# Altium PCB rk3288_backend.PcbDoc (part 1 of 3)
Units mm, origin at the board's own origin, x right, y up, seen from the top; angles counter-clockwise.
Board outline 46.39 x 100.03 mm, 4 copper layers (Top Layer, horizontal, vertical, Bottom Layer), stack 0.778 mm thick; 208 components, 207 nets, 778 pads, 333 vias.
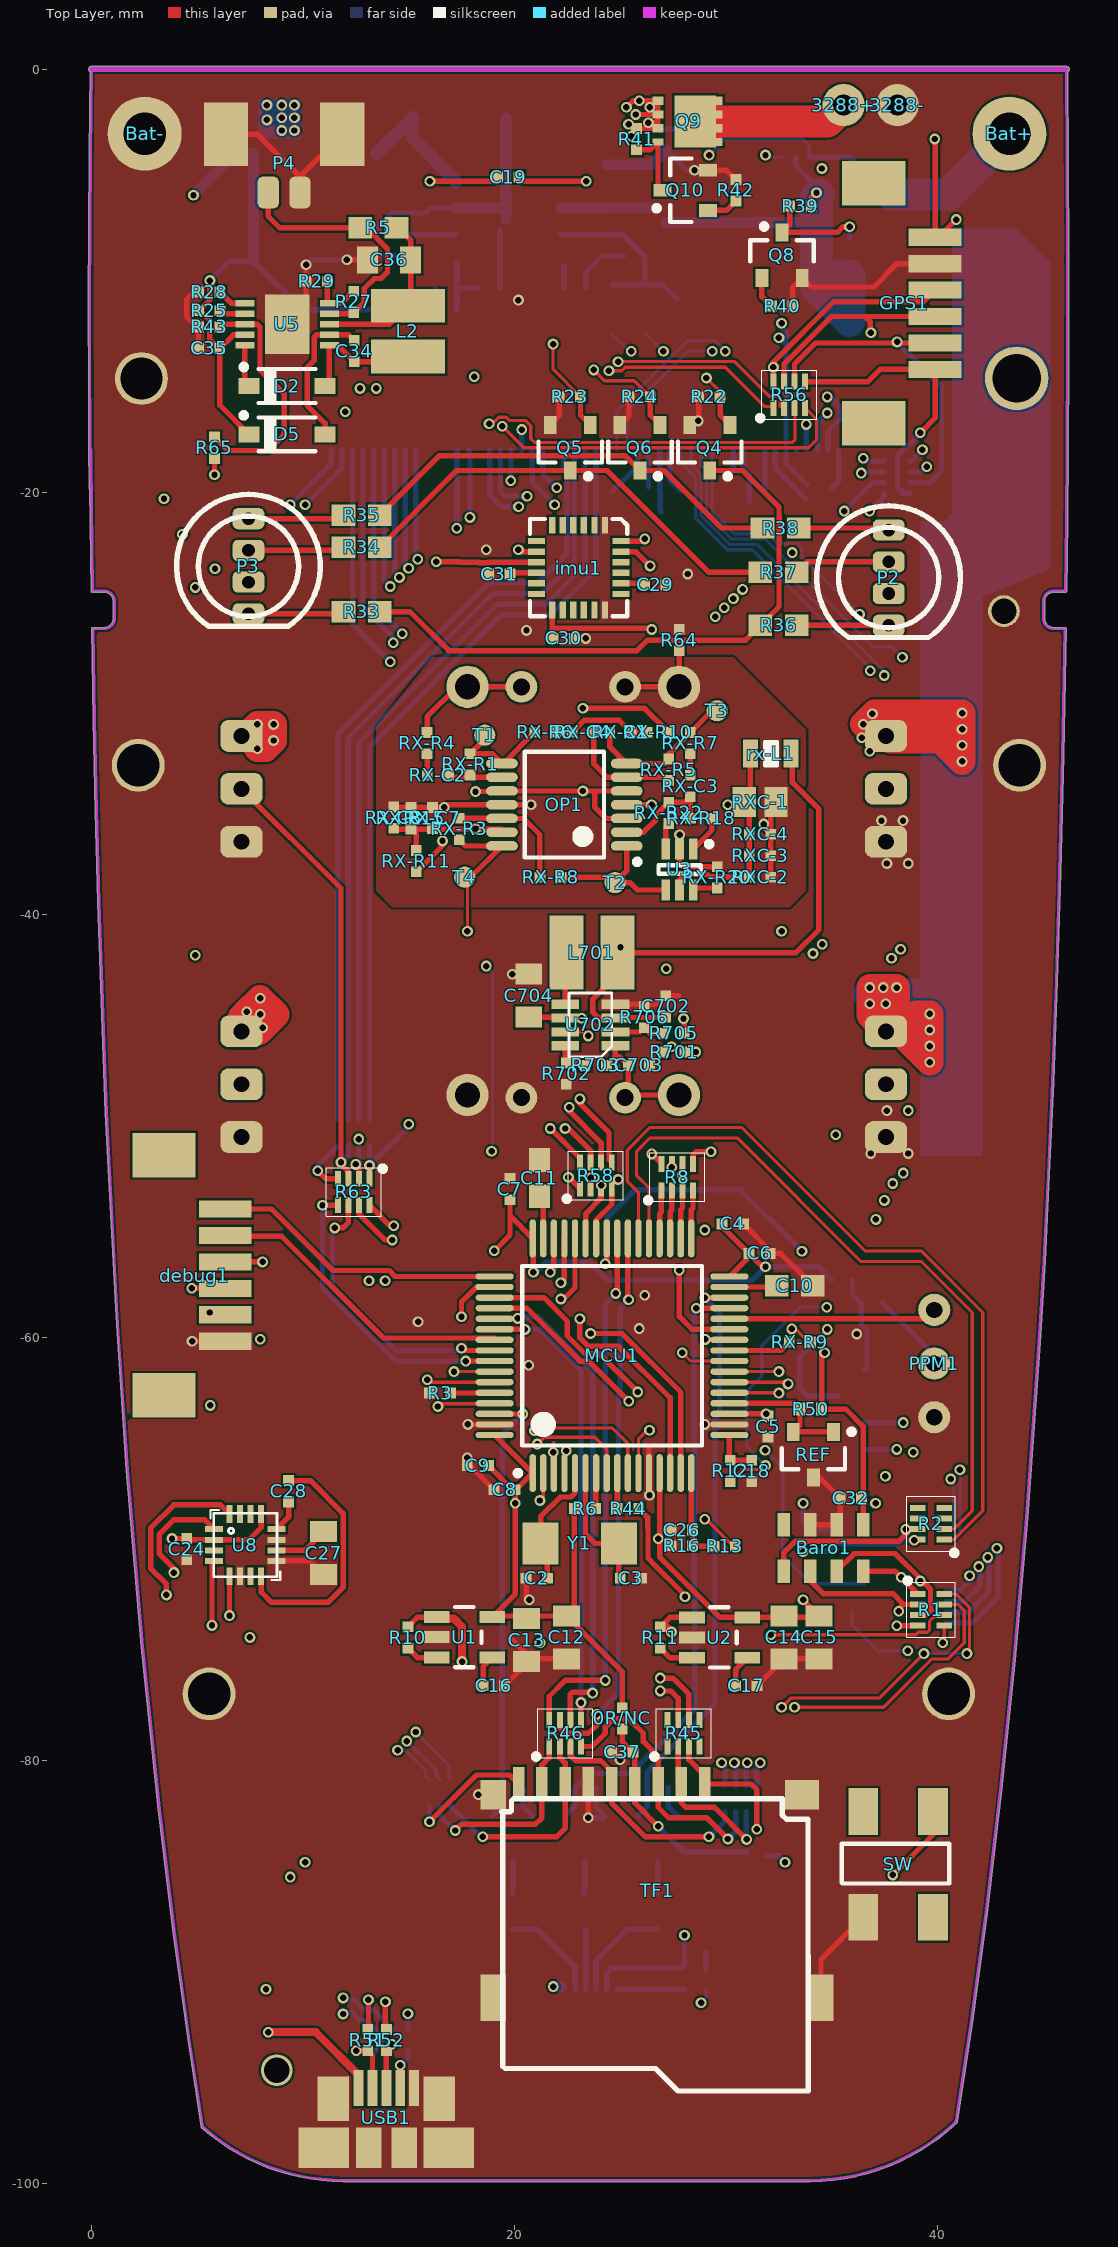
[diagram p0: Top Layer view]
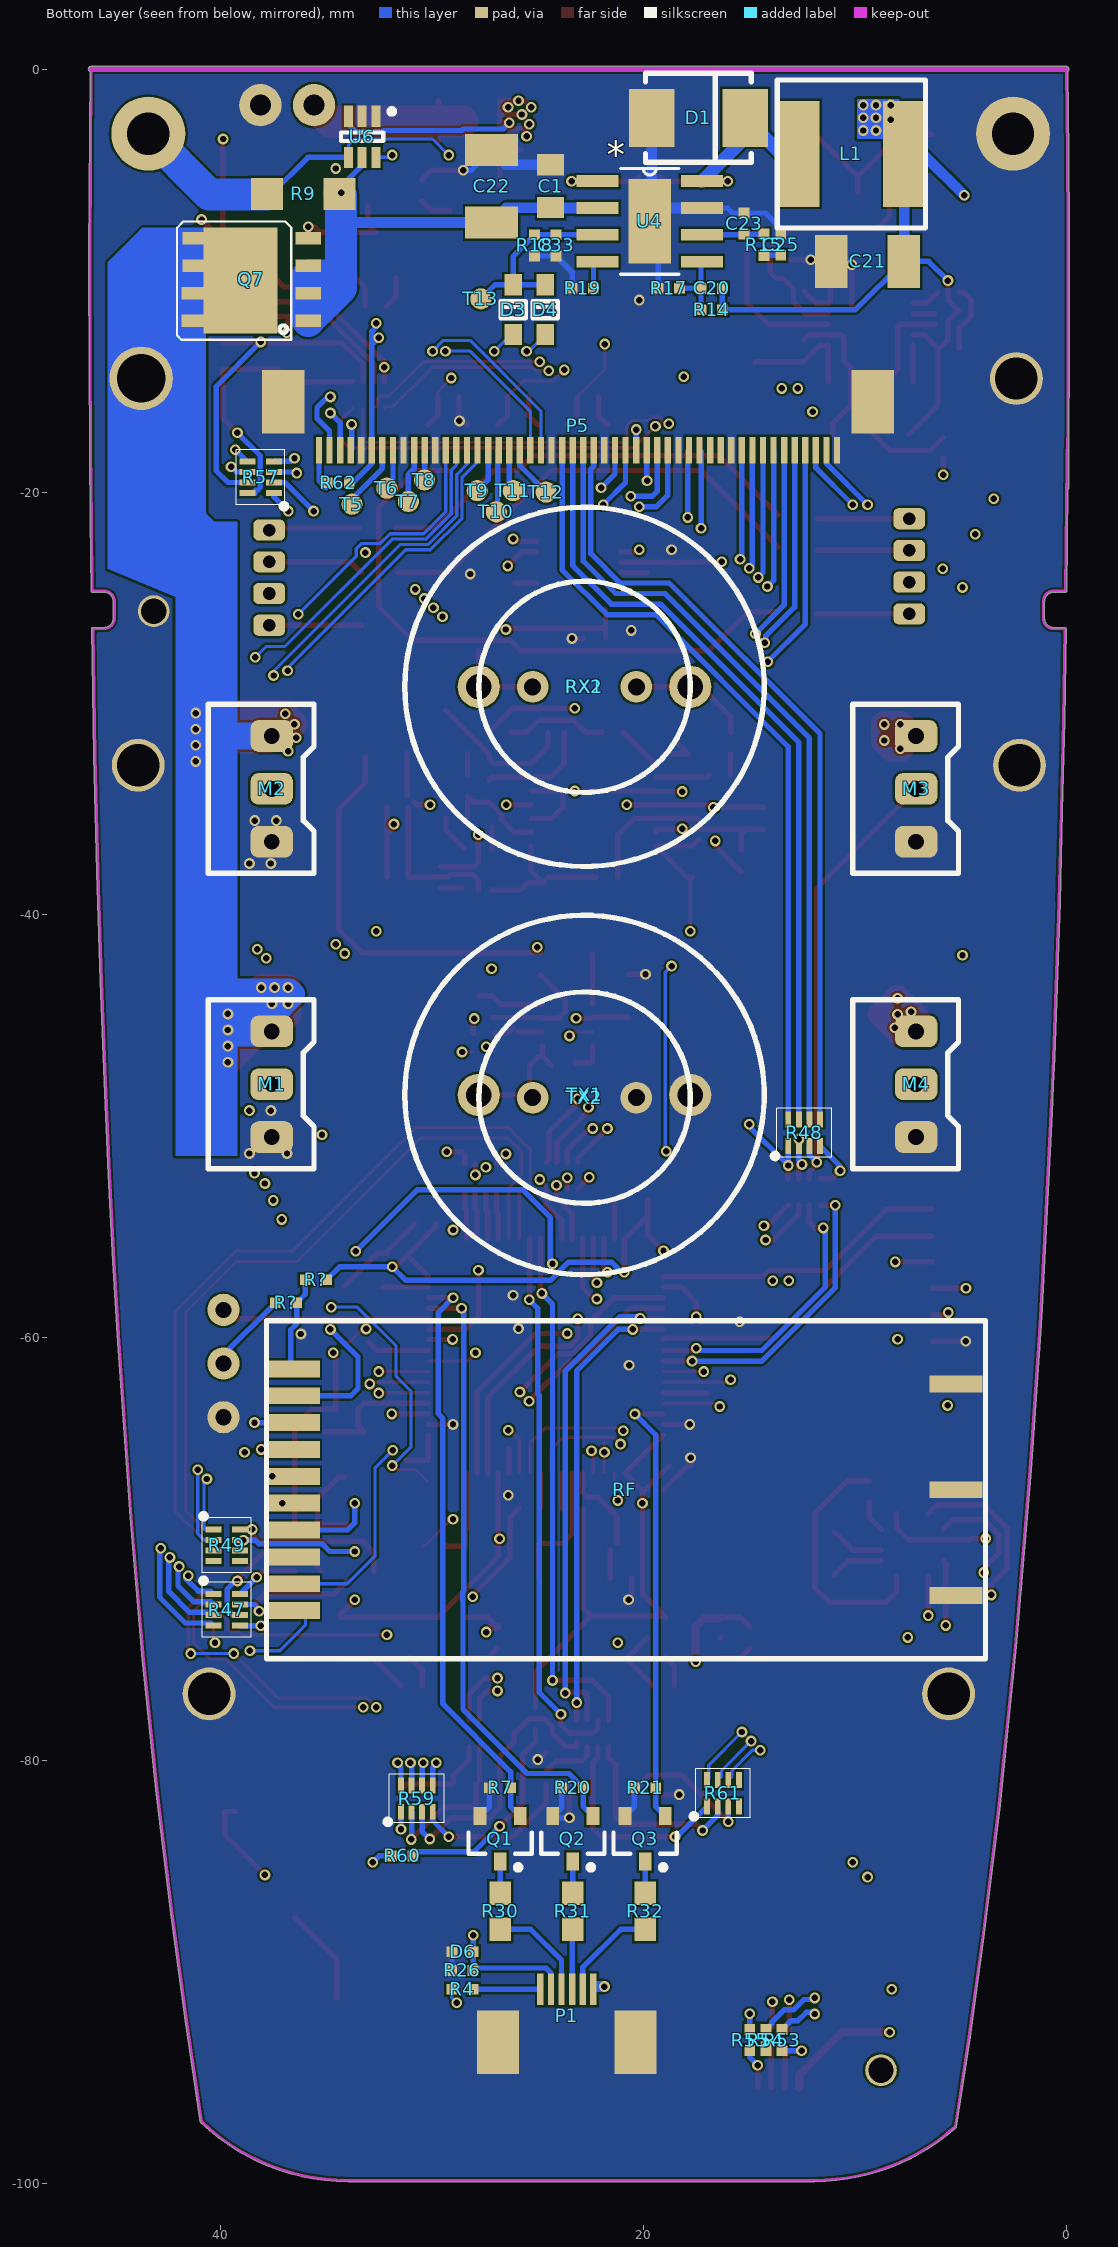
[diagram p1: Bottom Layer view, seen from below]
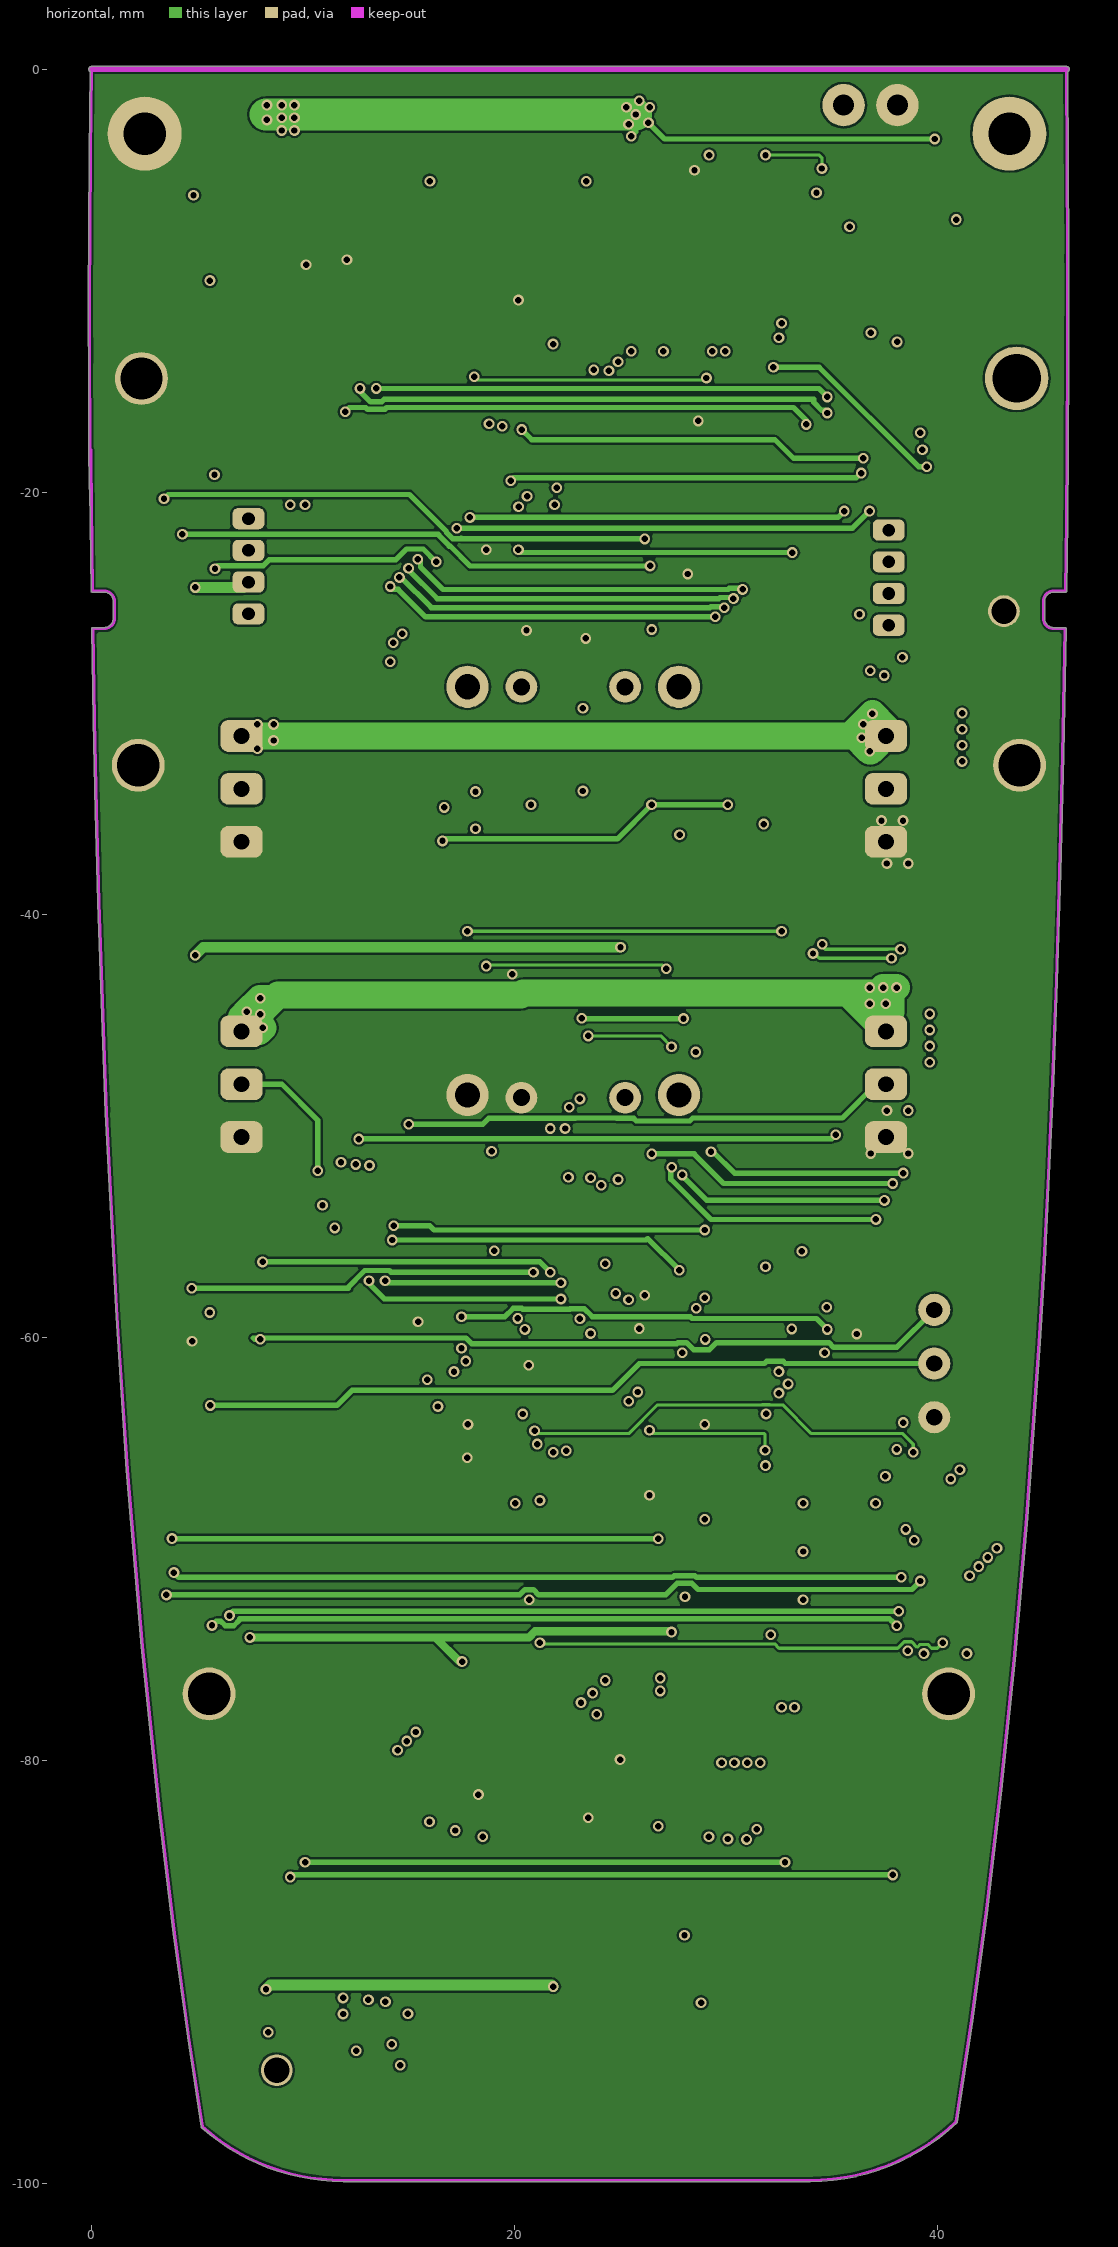
[diagram p2: horizontal]
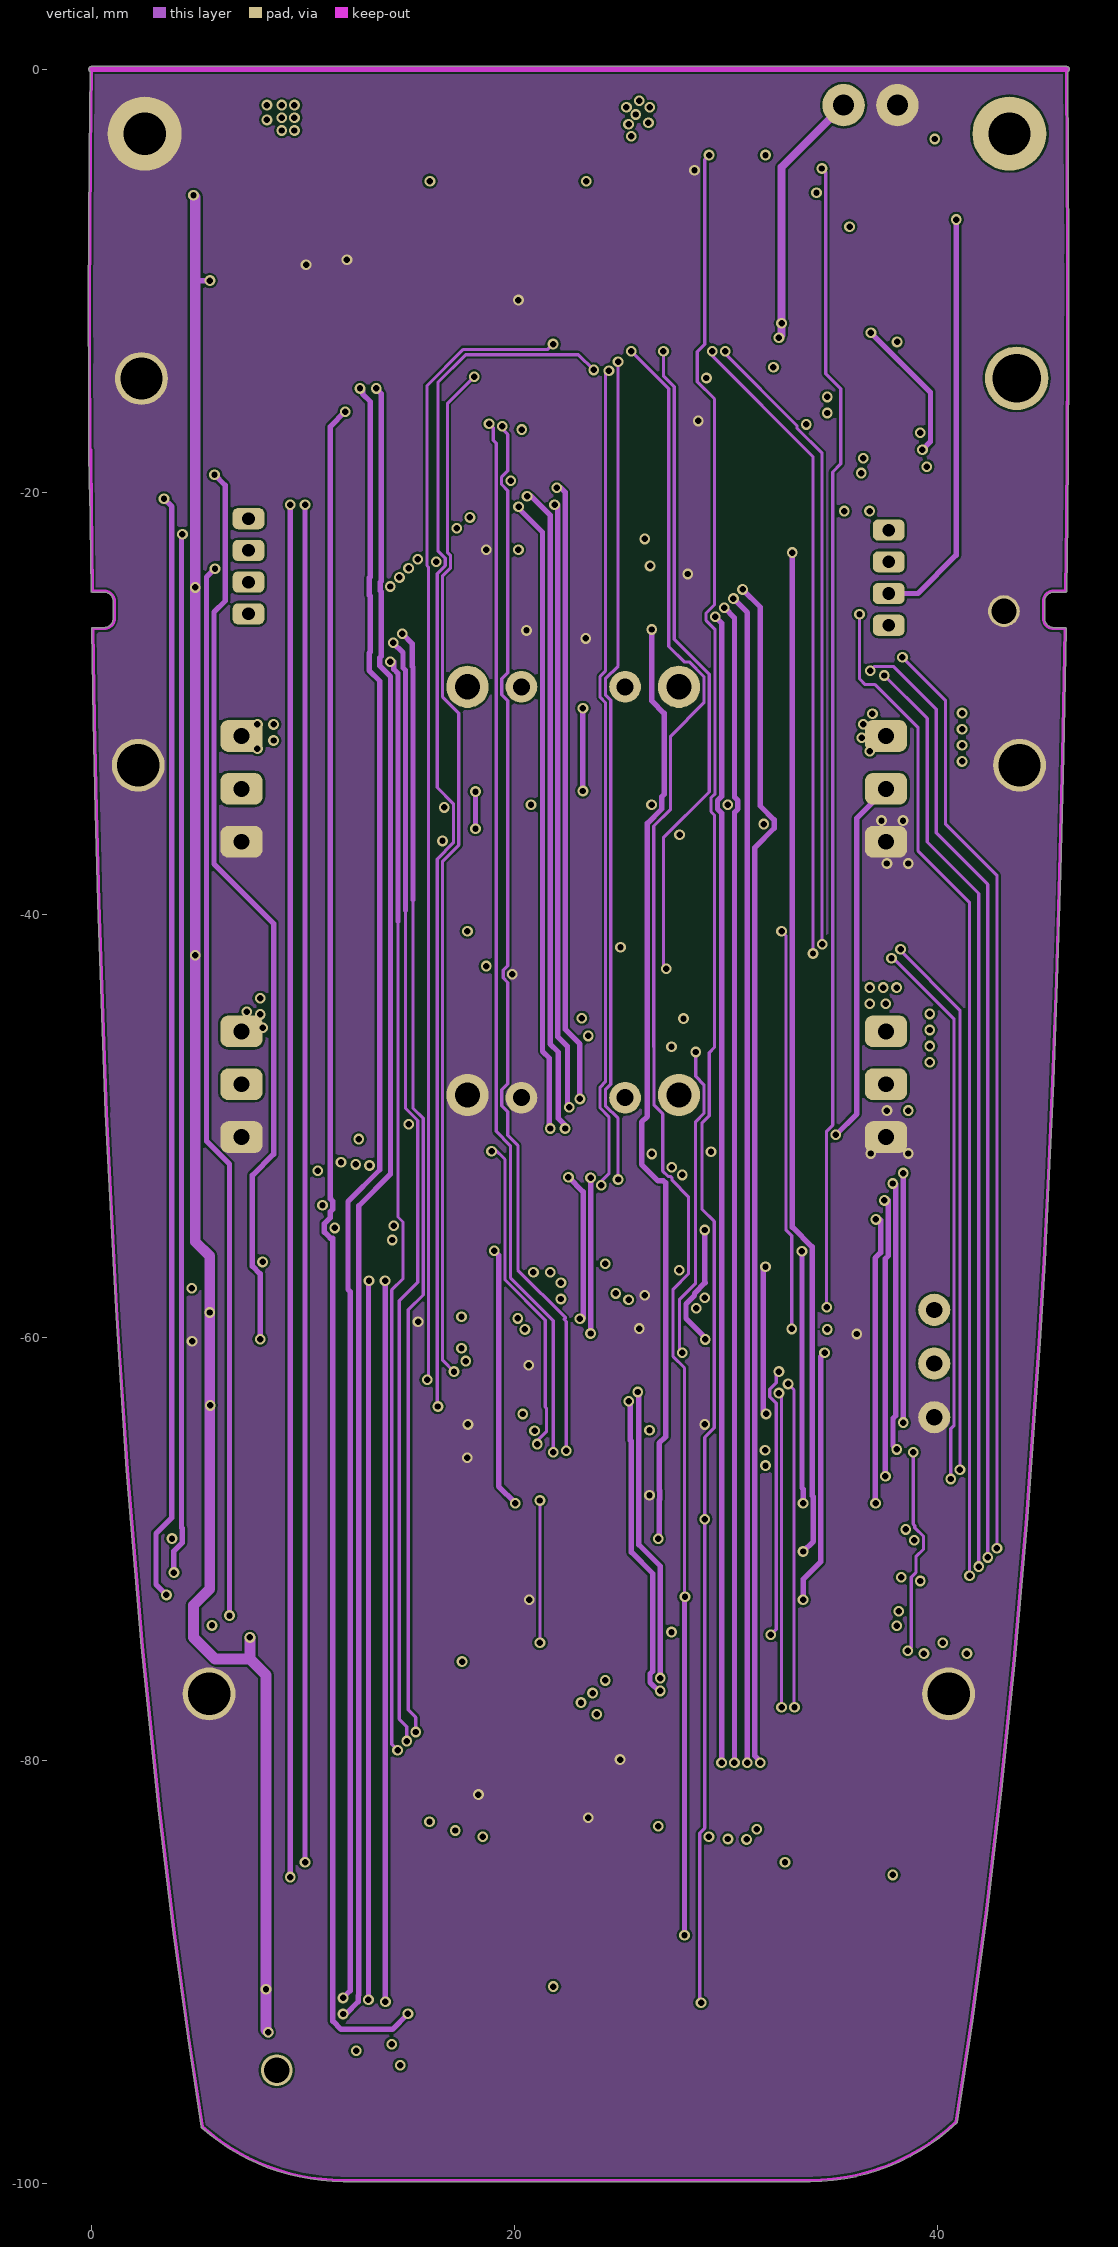
[diagram p3: vertical]

## Layer stack, top to bottom
Top Solder: solder mask 0.0102, Solder Resist, Dk 3.5
Top Layer: signal copper 0.0356
Dielectric 1: core 0.254, FR-4, Dk 4.2
horizontal: signal copper 0.036
Dielectric 2: core 0.254, Dk 4.2
vertical: signal copper 0.036
Dielectric 3: prepreg 0.127, Dk 4.2
Bottom Layer: signal copper 0.0356
Bottom Solder: solder mask 0.0102, Solder Resist, Dk 3.5

## Board outline
1.652,-66.253 1.208,-59.763 cw(c1.272,-59.759) 1.208,-59.762 1.137,-58.592 cw(c1.201,-58.588) 1.137,-58.591 0.661,-49.351 cw(c0.725,-49.348) 0.661,-49.35 cw(c661.906,-20.44) 0.553,-46.759 cw(c0.617,-46.755) 0.553,-46.758 0.298,-39.394 cw(c0.361,-39.39) 0.298,-39.392 cw(c895.193,-12.838) 0.007,-26.473 cw(c0.071,-26.471) 0.051,-26.41 cw(c0.071,-26.471) 0.072,-26.407 0.595,-26.407 ccw(c0.595,-25.971) 1.031,-25.971 cw(c1.095,-25.971) 1.031,-25.97 1.031,-25.171 ccw(c0.595,-25.171) 0.595,-24.735 ccw(c0.595,-25.171) 0.595,-24.735 cw(c0.595,-24.671) 0.595,-24.735 ccw(c0.595,-24.671) 0.595,-24.735 0.045,-24.735 cw(c0.045,-24.671) -0.019,-24.672 -0.071,-19.871 cw(c-0.046,-19.812) -0.11,-19.812 -0.124,-17.785 -0.124,-17.784 -0.128,-17.029 cw(c-0.064,-17.029) -0.128,-17.029 -0.139,-14.084 cw(c-0.075,-14.084) -0.139,-14.084 -0.14,-13.858 cw(c-0.076,-13.858) -0.14,-13.857 cw(c994.234,-11.554) -0.142,-10.896 cw(c-0.078,-10.896) -0.142,-10.896 -0.134,-7.626 cw(c-0.07,-7.627) -0.134,-7.626 -0.11,-4.008 cw(c-0.046,-4.008) -0.11,-4.007 -0.065,-0.109 cw(c0,0) 0,0.127 46.117,0.127 cw(c46.117,0) 46.244,0 cw(c46.117,0) 46.17,-0.116 46.226,-8.734 cw(c46.162,-8.736) 46.226,-8.736 cw(c-1066.82,-9.586) 46.226,-9.586 cw(c-1066.82,-9.586) 46.195,-17.994 ccw(c46.131,-17.993) 46.195,-17.993 46.195,-17.994 cw(c-1066.82,-9.586) 46.124,-24.672 cw(c46.06,-24.671) 46.096,-24.724 ccw(c46.06,-24.671) 46.124,-24.671 46.096,-24.724 cw(c46.06,-24.671) 46.06,-24.735 ccw(c46.06,-24.671) 46.096,-24.724 46.06,-24.735 45.511,-24.735 cw(c45.511,-24.671) 45.51,-24.735 cw(c45.511,-25.171) 45.511,-24.735 45.51,-24.735 ccw(c45.511,-25.171) 45.075,-25.171 cw(c45.011,-25.171) 45.075,-25.173 45.075,-25.971 ccw(c45.511,-25.971) 45.511,-26.407 cw(c45.511,-26.471) 45.511,-26.407 46.034,-26.407 cw(c46.034,-26.471) 46.098,-26.471 cw(c46.034,-26.471) 46.098,-26.472 45.987,-32.454 ccw(c45.923,-32.453) 45.987,-32.453 45.987,-32.454 cw(c45.923,-32.453) 45.987,-32.454 cw(c45.923,-32.453) 45.987,-32.455 45.987,-32.454 45.987,-32.455 45.849,-37.983 ccw(c45.785,-37.982) 45.849,-37.982 45.849,-37.983 ccw(c45.785,-37.982) 45.849,-37.983 cw(c45.785,-37.982) 45.849,-37.984 45.686,-43.143 ccw(c45.622,-43.141) 45.686,-43.141 45.686,-43.143 cw(c45.622,-43.141) 45.686,-43.143 45.505,-47.896 ccw(c45.441,-47.893) 45.505,-47.893 45.505,-47.896 cw(c45.441,-47.893) 45.505,-47.896 45.307,-52.288 cw(c45.244,-52.286) 45.307,-52.289 45.095,-56.378 cw(c45.032,-56.375) 45.095,-56.379 ccw(c45.032,-56.375) 45.095,-56.378 45.095,-56.379 44.868,-60.227 cw(c44.804,-60.223) 44.868,-60.228 44.279,-68.505 cw(c44.215,-68.501) 44.279,-68.506 44.279,-68.507 ccw(c44.215,-68.501) 44.279,-68.506 44.279,-68.507 43.69,-75.229 ccw(c43.627,-75.224) 43.69,-75.229 cw(c43.627,-75.224) 43.69,-75.23 43.058,-81.363 cw(c42.994,-81.356) 43.058,-81.364 cw(c42.994,-81.356) 43.058,-81.364 42.384,-87.031 cw(c42.32,-87.024) 42.384,-87.031 cw(c42.32,-87.024) 42.384,-87.032 41.673,-92.295 cw(c41.609,-92.287) 41.672,-92.296 40.947,-97.083 cw(c40.884,-97.073) 40.927,-97.12 ccw(c33.983,-89.836) 40.928,-97.119 40.927,-97.12 cw(c33.983,-89.836) 33.984,-99.9 cw(c33.983,-89.836) 33.983,-99.9 ccw(c33.983,-99.836) 33.984,-99.9 33.983,-99.9 27.848,-99.9 cw(c27.848,-99.836) 27.838,-99.899 cw(c27.828,-99.836) 27.828,-99.9 18.278,-99.9 cw(c18.278,-99.836) 18.267,-99.899 cw(c18.257,-99.836) 18.257,-99.9 11.905,-99.9 cw(c11.905,-99.836) 11.904,-99.9 ccw(c11.905,-89.836) 11.905,-99.9 ccw(c11.905,-99.836) 11.905,-99.9 11.904,-99.9 cw(c11.905,-89.836) 5.217,-97.356 cw(c5.259,-97.308) 5.196,-97.316 4.544,-93.061 cw(c4.607,-93.052) 4.544,-93.061 cw(c4.607,-93.052) 4.544,-93.06 3.871,-88.182 cw(c3.935,-88.173) 3.871,-88.18 3.156,-82.31 cw(c3.22,-82.302) 3.156,-82.309 2.358,-74.608 cw(c2.421,-74.601) 2.357,-74.607 1.652,-66.254 cw(c1.716,-66.249)

## Design rules (kind name [scope] priority, off if disabled: settings)
Clearance [All] p1: gap=0.102
DiffPairsRouting [All] p1: maxlimit=0.254 minlimit=0.254 mostfreqgap=0.254 toplayer_minwidth=0.152 toplayer_maxwidth=0.381 toplayer_prefwidth=0.254 midlayer1_minwidth=0.152 midlayer1_maxwidth=0.381 midlayer1_prefwidth=0.254 midlayer2_minwidth=0.152 midlayer2_maxwidth=0.381 midlayer2_prefwidth=0.254 bottomlayer_minwidth=0.152 bottomlayer_maxwidth=0.381 bottomlayer_prefwidth=0.254 maxuncoupledlength=12.7
MinimumSolderMaskSliver [All] p1 off: minsoldermaskwidth=0.254
PlaneConnect [All] p1: planeconnectstyle=Direct reliefexpansion=0.508 reliefentries=4 reliefconductorwidth=0.254 reliefairgap=0.254
PolygonConnect [All] p1: connectstyle=Direct reliefconductorwidth=0.254 reliefentries=4 polygonreliefangle="90 Angle" airgapwidth=0.254
RoomDefinition sonar_tx [InComponentClass('sonar_tx')] p1 off: confinementstyle=ConfineIn formatcopy=TRUE lockcomponents=FALSE outline -37.668,21.539 -14.554,21.539 -14.554,-9.906 -37.668,-9.906
RoomDefinition sonar_rx [InComponentClass('sonar_rx')] p2 off: confinementstyle=ConfineIn formatcopy=TRUE lockcomponents=FALSE outline -84.582,42.139 -27.076,42.139 -27.076,74.371 -84.582,74.371
RoomDefinition sensor [InComponentClass('sensor')] p3 off: confinementstyle=ConfineIn formatcopy=TRUE lockcomponents=FALSE outline -87.63,-32.41 -46.914,-32.41 -46.914,-54.94 -87.63,-54.94
RoomDefinition rk3288 [InComponentClass('rk3288')] p4 off: confinementstyle=ConfineIn formatcopy=TRUE lockcomponents=FALSE outline -14.224,-63.881 -37.668,-63.881 -37.668,-36.424 -14.224,-36.424
RoomDefinition power [InComponentClass('power')] p5 off: confinementstyle=ConfineIn formatcopy=TRUE lockcomponents=FALSE outline -58.953,-83.287 -91.948,-83.287 -91.948,-61.087 -58.953,-61.087
RoomDefinition PiAttachment [InComponentClass('PiAttachment')] p6 off: confinementstyle=ConfineIn formatcopy=TRUE lockcomponents=FALSE outline -86.69,-22.25 -48.158,-22.25 -48.158,-0.356 -86.69,-0.356
RoomDefinition mcu [InComponentClass('mcu')] p7 off: confinementstyle=ConfineIn formatcopy=TRUE lockcomponents=FALSE outline -87.325,35.433 -46.304,35.433 -46.304,9.83 -87.325,9.83
RoomDefinition connector [InComponentClass('connector')] p8 off: confinementstyle=ConfineIn formatcopy=TRUE lockcomponents=FALSE outline -44.45,-113.792 -17.928,-113.792 -17.928,-84.836 -44.45,-84.836
RoutingVias [All] p1: holewidth=0.305 width=0.508 viastyle="Through Hole" minholewidth=0.305 minwidth=0.508 maxholewidth=0.711 maxwidth=1.27
SilkToSilkClearance [All] p1 off: silktosilkclearance=0.254
SilkToSolderMaskClearance [IsPad] p1 off: minsilkscreentomaskgap=0.254 clearancetoexposedcopper=TRUE
SolderMaskExpansion [All] p1: expansion=0.102
UnpouredPolygon [All] p1: allowunpoured=FALSE
Width [All] p1: maxlimit=5.08 minlimit=0.102 preferedwidth=0.102
24 further rules are at their usual default settings.

## Classes and differential pairs
component class rk3288: 3288+ 3288- P5 R47 R48 R49 R57 R58 R59 R60 R61 R62 SW T5 T6 T7 T8 T9 T10 T11 T12
component class connector: C37 M1 M2 M3 M4 Q7 Q8 Q9 Q10 R39 R40 R41 R42 TF1
component class PiAttachment: C34 C35 C36 D2 D4 D5 D6 L2 P1 P2 P3 P4 Q1 Q2 Q3 Q4 Q5 Q6 R4 R5 R7 R20 R21 R22 R23 R24 R25 R26 R27 R28 R29 R30 R31 R32 R33 R34 R35 R36 R37 R38 R43 U5
component class sonar_tx: C702 C703 C704 L701 R701 R702 R703 R705 R706 TX1 TX2 U702
component class sonar_rx: OP1 R64 RX1 RX2 RX-C1 RX-C2 RX-C3 RX-C4 RX-C7 RX-C8 rx-L1 RX-R1 RX-R3 RX-R4 RX-R5 RX-R6 RX-R7 RX-R8 RX-R9 RX-R10 RX-R11 RX-R15 RX-R18 RX-R20 RX-R22 RXC-1 RXC-2 RXC-3 RXC-4 T1 T2 T3 T4 U3
component class sensor: Baro1 C24 C27 C28 C29 C30 C31 C32 GPS1 imu1 U8
component class power: Bat+ Bat- C1 C12 C13 C14 C15 C16 C17 C18 C19 C20 C21 C22 C23 C25 C26 C33 D1 L1 R9 R10 R11 R12 R13 R14 R15 R16 R17 R18 R19 T13 U1 U2 U4 U6
component class mcu: 0R/NC C2 C3 C4 C5 C6 C7 C8 C9 C10 C11 D3 debug1 MCU1 PPM1 R1 R2 R3 R6 R8 R44 R45 R46 R50 R51 R52 R53 R54 R55 R56 R63 R65 R? REF RF USB1 Y1
differential pair 3288_OTG: +3288_OTG_P -3288_OTG_N
differential pair USB: +USB_P -USB_N

## Components (designator, comment, footprint, x,y, rotation, side; value= is the part's Value field where it differs from the comment)
0R/NC "NC/0R" 0402#1 25.1,-78 r90 top
3288+ "TestPad" "BatteryHole - 2mm" 35.574,-1.703 r180 top
3288- "TestPad" "BatteryHole - 2mm" 38.114,-1.703 r180 top
Baro1 "MS5611" MS5611 32.745,-68.834 r270 top
Bat+ "TestPad" BatteryHole 43.413,-3.048 r0 top
Bat- "TestPad" BatteryHole 2.519,-3.048 r0 top
C1 "Cap" 0805 24.385,-5.534 r90 bottom
C2 "22pF" 0402#1 21.061,-71.374 r180 top
C3 "22pF" 0402#1 25.506,-71.374 r0 top
C4 "0.1uF * 6" 0402#1 30.332,-54.61 r180 top
C5 "1n" 0402#1 32,-64.2 r90 top
C6 "1n" 0402#1 31.602,-56.007 r180 top
C7 "1n" 0402#1 19.791,-52.959 r270 top
C8 "1n" 0402#1 19.537,-67.183 r0 top
C9 "1n" 0402#1 18.267,-66.04 r0 top
C10 "2.2uF" 0603 33.253,-57.531 r0 top
C11 "2.2uF" 0603 21.188,-52.451 r90 top
C12 "22uF" 0805 22.471,-74.168 r270 top
C13 "22uF" 0805 20.574,-74.295 r270 top
C14 "22uF" 0805 32.745,-74.168 r270 top
C15 "22uF" 0805 34.409,-74.168 r270 top
C16 "0.1uf" 0402#1 19.029,-76.454 r0 top
C17 "0.1uF" 0402#1 30.967,-76.454 r0 top
C18 "2.2uF" 0402#1 31.221,-66.294 r270 top
C19 "Cap" 0402#1 19.7,-5.1 r0 top
C20 "Cap" 0402#1 16.765,-10.373 r0 bottom
C21 "Cap" 1210 9.399,-9.09 r0 bottom
C22 "Cap" 1210 27.179,-5.534 r90 bottom
C23 "Cap" 0402#1 15.241,-7.312 r90 bottom
C24 "0.1uF" 0402#1 4.5,-70 r90 top
C25 "Cap" 0402#1 13.5,-8.3 r90 bottom
C26 "47nF" 0402#1 27.919,-69.088 r180 top
C27 "4.7uF" 0805 10.974,-70.18 r90 top
C28 "0.22uF" 0402#1 9.323,-67.259 r90 top
C29 "2.2nF" 0402#1 26.649,-24.384 r0 top
C30 "0.1uF" 0402#1 22.331,-26.924 r180 top
C31 "0.1uF" 0402#1 19.283,-23.876 r0 top
C32 "0.1uF" 0402#1 35.92,-67.577 r180 top
C33 "Cap" 0402#1 24.131,-8.328 r270 bottom
C34 "0.1uF" 0402#1 12.425,-13.335 r90 top
C35 "1uF" 0402#1 5.567,-13.208 r180 top
C36 "4.7uF" 0805 14.076,-9.017 r180 top
C37 "0.1uF" 0402#1 25.1,-79.6 r0 top
C702 "1u" 0402#1 27.157,-44.323 r90 top
C703 "5n6" 0402#1 25.887,-47.117 r0 top
C704 "10uf/0805" 0805 20.68,-43.815 r90 top
D1 "Diode" LC-SMB(DO-214AA)_S1 17.4,-2.3 r0 bottom
D2 "1N5819" SOD-123 9.25,-14.986 r0 top
D3 "1N4148" LC-SOD-323 26.163,-11.376 r270 bottom
D4 "1N4148" LC-SOD-323 24.639,-11.376 r270 bottom
D5 "1N4148" SOD-123 9.25,-17.272 r0 top
D6 "TVS 5V, 0402/ESD9BL0521P" 0402#1 28.554,-89.027 r180 bottom
debug1 "debug" WFRSM125 6.329,-57.658 r270 top
GPS1 "GPS" WFRSM125 39.9,-11.7 r270 top
imu1 "MPU6050" MPU6050-2 23.039,-23.568 r270 top
L1 "Inductor" L7022 10.161,-4.01 r180 bottom
L2 "Inductor" L3521 14.965,-13.589 r90 top
L701 "47uH/200mA" L3521 24.871,-41.783 r180 top
M1 "PiMotor" PiMotor 38.079,-48.006 r270 bottom
M2 "PiMotor" PiMotor 38.079,-34.036 r270 bottom
M3 "PiMotor" PiMotor 7.599,-34.036 r270 bottom
M4 "PiMotor" PiMotor 7.599,-48.006 r270 bottom
MCU1 "STM32F103R8T6" LQFP64_N 24.617,-60.846 r90 top
OP1 "LM324" TSSOP14_44MM_065P 22.363,-34.787 r180 top
P1 "PiTail" FPC-0.5mm-6 24.871,-90.805 r180 bottom
P2 "PiEye" PiEyeLED 37.7,-26.3 r90 top
P3 "PiEye" PiEyeLED 7.424,-25.759 r90 top
P4 "PiFlashlight" PiFlashLight 8.361,-5.334 r0 top
P5 "rk3288-50p" FPC-0.5mm-50-revert 23.093,-18.034 r0 bottom
PPM1 "PPMIn" ServoConnector 39.857,-63.754 r90 top
Q1 "NMOS" SOT23_L 26.776,-83.693 r270 bottom
Q2 "NMOS" SOT23_L 23.334,-83.693 r270 bottom
Q3 "NMOS" SOT23_L 19.918,-83.693 r270 bottom
Q4 "NMOS" SOT23_L 29.244,-17.906 r270 top
Q5 "NMOS" SOT23_L 22.642,-17.906 r270 top
Q6 "NMOS" SOT23_L 25.94,-17.906 r270 top
Q7 "PMOS" MOS_DFN5x6 39.027,-9.991 r180 bottom
Q8 "NMOS" SOT23_L 32.657,-8.792 r90 top
Q9 "PMOS" MOS_DFN3x3 26.793,-3.444 r90 top
Q10 "NMOS" SOT23_L 28.076,-5.73 r180 top
R1 "NC/200R*4" 0402X4 39.703,-72.86 r0 top
R2 "NC/200R*4" 0402X4 39.703,-68.796 r180 top
R3 "10k" 0402#1 16.489,-62.611 r0 top
R4 "30k" 0402#1 28.554,-90.805 r0 bottom
R5 "0.4R" 0603 13.575,-7.5 r180 top
R6 "10k" 0402#1 23.347,-68.072 r180 top
R7 "10k" 0402#1 26.776,-81.28 r0 bottom
R8 "200R*4" 0402X4 27.7,-52.4 r90 top
R9 "1mΩ, 1%, 1206" 1206 37.8,-5.9 r180 bottom
R10 "10k" 0402#1 14.965,-74.168 r270 top
R11 "10k" 0402#1 26.903,-74.168 r270 top
R12 "1k" 0402#1 30.205,-66.294 r90 top
R13 "100k,1%" 0402#1 29.951,-69.85 r180 top
R14 "Res2" 0402#1 16.765,-11.376 r0 bottom
R15 "Res2" 0402#1 14.3,-8.3 r270 bottom
R16 "51k,1%" 0402#1 27.919,-69.837 r0 top
R17 "Res2" 0402#1 18.797,-10.36 r0 bottom
R18 "Res2" 0402#1 25.147,-8.328 r270 bottom
R19 "Res2" 0402#1 22.861,-10.36 r0 bottom
R20 "10k" 0402#1 23.347,-81.28 r0 bottom
R21 "10k" 0402#1 19.918,-81.28 r0 bottom
R22 "10k" 0402#1 29.231,-15.493 r180 top
R23 "10k" 0402#1 22.629,-15.493 r180 top
R24 "10k" 0402#1 25.927,-15.493 r180 top
R25 "10k" 0402#1 5.567,-11.43 r0 top
R26 "10k" 0402#1 28.554,-89.916 r0 bottom
R27 "30k" 0402#1 12.4,-11 r270 top
R28 "357k" 0402#1 5.567,-10.541 r0 top
R29 "10k" 0402#1 10.647,-10.033 r0 top
R30 "30R" 0603 26.776,-87.122 r90 bottom
R31 "10R" 0603 23.347,-87.122 r90 bottom
R32 "10R" 0603 19.918,-87.122 r90 bottom
R33 "30R" 0603 12.772,-25.659 r0 top
R34 "10R" 0603 12.772,-22.611 r0 top
R35 "10R" 0603 12.772,-21.087 r0 top
R36 "30R" 0603 32.5,-26.3 r180 top
R37 "10R" 0603 32.5,-23.8 r180 top
R38 "10R" 0603 32.6,-21.7 r180 top
R39 "10k" 0402#1 33.528,-6.477 r0 top
R40 "10k" 0402#1 32.657,-11.205 r0 top
R41 "10k" 0402#1 25.777,-3.317 r90 top
R42 "10k" 0402#1 30.476,-5.73 r90 top
R43 "10k" 0402#1 5.567,-12.192 r0 top
R44 "1k" 0402#1 25.379,-68.072 r180 top
R45 "NC/200R*4" 0402X4 28,-78.7 r90 top
R46 "NC/200R*4" 0402X4 22.4,-78.7 r90 top
R47 "NC/200R*4" 0402X4 39.703,-72.86 r180 bottom
R48 "200R*4" 0402X4 12.4,-50.3 r90 bottom
R49 "NC/200R*4" 0402X4 39.703,-69.812 r180 bottom
R50 "10k" 0402#2 34.015,-63.373 r180 top
R51 "0R/NC" 0402#1 13.06,-93.218 r90 top
R52 "0R/NC" 0402#1 13.949,-93.218 r90 top
R53 "NC/0R" 0402#1 13.441,-93.218 r90 bottom
R54 "NC/0R" 0402#1 14.203,-93.218 r90 bottom
R55 "NC/0R" 0402#1 14.965,-93.218 r90 bottom
R56 "200R*4" 0402X4 33,-15.4 r90 top
R57 "200R*4" 0402X4 38.1,-19.3 r0 bottom
R58 "NC/200R*4" 0402X4 23.855,-52.324 r90 top
R59 "NC/200R*4" 0402X4 30.713,-81.788 r90 bottom
R60 "NC/0R" 0402#1 31.4,-84.5 r0 bottom
R61 "NC/200R*4" 0402X4 16.235,-81.534 r90 bottom
R62 "NC/0R" 0402#1 34.417,-19.558 r0 bottom
R63 "200R*4" 0402X4 12.4,-53.1 r270 top
R64 "0R" 0402#1 27.8,-27 r270 top
R65 "NC/200R" 0402#1 5.818,-17.908 r90 top
R701 "10k" 0402#1 27.559,-46.482 r0 top
R702 "10k" 0402#1 22.458,-47.498 r270 top
R703 "100k" 0402#1 23.855,-47.117 r180 top
R705 "453K 1%" 0402#1 27.538,-45.593 r180 top
R706 "16.5k 1%" 0402#1 26.141,-44.831 r90 top
R? "" 0402#1 35.485,-57.252 r0 bottom
R? "" 0402#1 36.908,-58.345 r180 bottom
REF "TL431" SOT-23B_L 34.142,-65.519 r270 top
RF "RFModule" RFMODULE 37.822,-67.184 r180 bottom
RX1 "sonar" sonar-16mm 22.785,-29.21 r180 bottom
RX2 "NC" sonar-10mm 22.785,-29.21 r180 bottom
RX-C1 "1nF" 0402#1 25.017,-31.358 r180 top
RX-C2 "10nF" 0402#1 16.381,-33.39 r0 top
RX-C3 "1nF" 0402#1 28.319,-33.898 r270 top
RX-C4 "1nF" 0402#1 23.239,-31.358 r0 top
RX-C7 "4.7uF" 0402#1 16.127,-35.422 r90 top
RX-C8 "100nF" 0402#1 14.3,-35.4 r90 top
rx-L1 "47uH" 0805-IND 32.129,-32.374 r180 top
RX-R1 "91k" 0402#1 17.905,-32.882 r90 top
RX-R3 "120k" 0402#1 17.397,-35.93 r270 top
RX-R4 "10k" 0402#1 15.873,-31.866 r270 top
RX-R5 "36k" 0402#1 27.303,-33.136 r90 top
RX-R6 "18k" 0402#1 21.461,-31.358 r0 top
RX-R7 "10k" 0402#1 28.319,-31.866 r270 top
RX-R8 "2k" 0402#1 21.715,-38.216 r180 top
RX-R9 "1k /0R" 0402#1 33.507,-60.198 r180 top
RX-R10 "430Ω" 0402#1 26.795,-31.358 r180 top
RX-R11 "1k" 0402#1 15.365,-37.454 r270 top
RX-R15 "1k" 0402#1 15.111,-35.422 r270 top
RX-R18 "120k" 0402#1 28.827,-35.422 r0 top
RX-R20 "91k" 0402#1 29.589,-38.216 r270 top
RX-R22 "12k" 0402#1 27.303,-35.168 r270 top
RXC-1 "47uF" C0805 31.621,-34.66 r180 top
RXC-2 "1nF" 0402#1 31.621,-38.216 r180 top
RXC-3 "10nF" 0402#1 31.621,-37.2 r180 top
RXC-4 "100nF" 0402#1 31.621,-36.184 r180 top
SW "SW-PB" SW1 36.5,-87.4 r90 top
T1 "TestPad" "TestPad - 1mm" 18.6,-31.5 r180 top
T2 "TestPad" "TestPad - 1mm" 24.763,-38.47 r180 top
T3 "TestPad" "TestPad - 1mm" 29.589,-30.342 r180 top
T4 "TestPad" "TestPad - 1mm" 17.651,-38.216 r180 top
T5 "TestPad" "TestPad - 1mm" 33.782,-20.574 r180 bottom
T6 "TestPad" "TestPad - 1mm" 32.131,-19.812 r180 bottom
T7 "TestPad" "TestPad - 1mm" 31.115,-20.447 r0 bottom
T8 "TestPad" "TestPad - 1mm" 30.353,-19.431 r0 bottom
T9 "TestPad" "TestPad - 1mm" 27.855,-19.934 r180 bottom
T10 "TestPad" "TestPad - 1mm" 26.955,-20.934 r270 bottom
T11 "TestPad" "TestPad - 1mm" 26.155,-19.934 r270 bottom
T12 "TestPad" "TestPad - 1mm" 24.6,-20 r270 bottom
T13 "TestPad" "TestPad - 1mm" 27.687,-10.868 r90 bottom
TF1 "TF" TF 19,-91.2 r0 top
TX1 "sonar" sonar-16mm 22.785,-48.514 r180 bottom
TX2 "NC" sonar-10mm 22.785,-48.641 r180 bottom
U1 "RT9013-33GB" SOT23-5 17.632,-74.155 r270 top
U2 "RT9013-33GB" SOT23-5 29.697,-74.168 r270 top
U3 "TS5A3159DCKR" LC-SC-70-6(SOT-363) 27.811,-37.848 r90 top
U4 "TPS54340" D8-Pad 19.7,-7.2 r180 bottom
U5 "LT3592" LT3592 7.25,-11.065 r0 top
U6 "INA199" LC-SC-70-6(SOT-363) 33.3,-3.2 r90 bottom
U8 "HMC5983" HMC5883-MAN 7.278,-70.053 r0 top
U702 "LT3469" SOT23-8 23.601,-45.212 r90 top
USB1 "USB Micro Type B" MOLEX-47346-0001 13.949,-98.298 r90 top
Y1 "XTAL" 5032 23.093,-69.723 r180 top

## Footprints (in the part's own frame and the unit in brackets; to place one, negate y for a bottom-side part, rotate by r counter-clockwise, add the part's x,y. Pads: shape width x height; smd on the part's side, far side on the other; paste and mask are expansions set on the pad)
0402#1 [mil] "0402-RES"
  rect 20x20 smd: 1(-19.69,0) 2(20,0)
0402#2 [mil] "0402-RES"
  rect 20x24 smd: 1(-19.69,0) 2(20,0)
0402X4 [mm]
  rect 0.75x0.28 smd: 1(-0.625,0.75) 2(-0.625,0.25) 3(-0.625,-0.25) 4(-0.625,-0.75) 5(0.625,-0.75) 6(0.625,-0.25) 7(0.625,0.25) 8(0.625,0.75)
  silkscreen extent -1.22,-1.3 1.15,1.5
0603 [mil] "0603-RES"
  rect 44x40 smd: 1(-33.46,0) 2(34,0)
0805 [mm]
  rect 1x1.27 smd: 1(-1.016,0) 2(1.016,0)
  body extent -1.27,-0.76 1.27,0.76, height 0.8
0805-IND [mil] "0805-IND"
  rect 28x52 smd: 1(-37.4,0) 2(38,0)
  silkscreen extent -12,-23 12,23
1206 [mil]
  rect 60x60 smd: 1(0,0) 2(135,0)
1210 [mm]
  rect 1.52x2.5 smd: 1(-1.715,0) 2(1.715,0)
5032 [mm]
  rect 1.7x2 smd: 1(-1.85,0) 2(1.85,0)
BatteryHole [mm]
  round 3.5 hole 2: 1(0,0)
"BatteryHole - 2mm" [mm]
  round 2 hole 1: 1(0,0)
C0805 [mm] "Chip Capacitor, Body 2.0x1.3mm, IPC High Density"
  rect 1.1x1.4 smd: 1(-0.75,0) 2(0.75,0)
  body extent -1.1,-0.72 1.1,0.72, height 1.4
D8-Pad [mil]
  rect 78.74x157.48 smd: 0(0,0)
  rect 78x22 smd: 1(-97,75) 2(-97,25) 3(-97,-25) 4(-97,-75) 5(97,-75) 6(97,-25) 7(97,25) 8(97,75)
  silkscreen extent -54,-98 54,99, body extent -118,-96 118,96, height 64
FPC-0.5mm-6 [mm]
  rect 2x3 smd: 0(-2,-2.5) 0(4.5,-2.5)
  rect 0.3x1.5 smd: 1(0,0) 2(0.5,0) 3(1,0) 4(1.5,0) 5(2,0) 6(2.5,0)
FPC-0.5mm-50-revert [mm]
  rect 2x3 smd: 0(-13.94,-2.305) 0(13.94,-2.305)
  rect 0.3x1.25 smd: 1(12.25,-0.02) 2(11.75,-0.02) 3(11.25,-0.02) 4(10.75,-0.02) 5(10.25,-0.02) 6(9.75,-0.02) 7(9.25,-0.02) 8(8.75,-0.02) 9(8.25,-0.02) 10(7.75,-0.02) 11(7.25,-0.02) 12(6.75,-0.02) 13(6.25,-0.02) 14(5.75,-0.02) 15(5.25,-0.02) 16(4.75,-0.02) 17(4.25,-0.02) 18(3.75,-0.02) 19(3.25,-0.02) 20(2.75,-0.02) 21(2.25,-0.02) 22(1.75,-0.02) 23(1.25,-0.02) 24(0.75,-0.02) 25(0.25,-0.02) 26(-0.25,-0.02) 27(-0.75,-0.02) 28(-1.25,-0.02) 29(-1.75,-0.02) 30(-2.25,-0.02) 31(-2.75,-0.02) 32(-3.25,-0.02) 33(-3.75,-0.02) 34(-4.25,-0.02) 35(-4.75,-0.02) 36(-5.25,-0.02) 37(-5.75,-0.02) 38(-6.25,-0.02) 39(-6.75,-0.02) 40(-7.25,-0.02) 41(-7.75,-0.02) 42(-8.25,-0.02) 43(-8.75,-0.02) 44(-9.25,-0.02) 45(-9.75,-0.02) 46(-10.25,-0.02) 47(-10.75,-0.02) 48(-11.25,-0.02) 49(-11.75,-0.02) 50(-12.25,-0.02)
HMC5883-MAN [mm]
  rect 0.85x0.285 smd: 1(-1.475,1.004) 2(-1.475,0.504) 3(-1.475,0.004) 4(-1.475,-0.496) 9(1.475,-0.496) 10(1.475,0.004) 11(1.475,0.504) 12(1.475,1.004)
  rect 0.285x0.85 smd: 5(-0.75,-1.221) 6(-0.25,-1.221) 7(0.25,-1.221) 8(0.75,-1.221) 13(0.75,1.729) 14(0.25,1.729) 15(-0.25,1.729) 16(-0.75,1.729)
  silkscreen extent -1.65,-1.4 1.65,1.9
L3521 [mm]
  rect 1.6x3.5 smd: 1(0,0) 2(2.4,0)
L7022 [mm]
  rect 2x5 smd: 1(-2.5,0) 2(2.5,0)
  silkscreen extent -3.5,-3.5 3.5,3.5
LC-SC-70-6(SOT-363) [mm]
  rect 1x0.42 smd mask+0.051: 1(0.97,-0.65) 2(0.97,0) 3(0.97,0.65) 4(-0.97,0.65) 5(-0.97,0) 6(-0.97,-0.65)
  silkscreen extent -0.2,-1.53 1.32,1, body extent -1.2,-1.1 1.2,1.1, height 1.1
LC-SMB(DO-214AA)_S1 [mil]
  rect 85x107.99 smd: 1(87.01,0) 2(-87.01,0)
  silkscreen extent -98,-83 98,83
LC-SOD-323 [mm]
  rect 1x0.83 smd: 1(1.18,0) 2(-1.18,0)
  silkscreen extent -0.4,-0.6 0.4,0.6, body extent -1.35,-0.63 1.35,0.62, height 1.1
LQFP64_N [mm]
  oval 1.8x0.3 smd: 1(-5.55,3.75) 2(-5.55,3.25) 3(-5.55,2.75) 4(-5.55,2.25) 5(-5.55,1.75) 6(-5.55,1.25) 7(-5.55,0.75) 8(-5.55,0.25) 9(-5.55,-0.25) 10(-5.55,-0.75) 11(-5.55,-1.25) 12(-5.55,-1.75) 13(-5.55,-2.25) 14(-5.55,-2.75) 15(-5.55,-3.25) 16(-5.55,-3.75) 33(5.55,-3.75) 34(5.55,-3.25) 35(5.55,-2.75) 36(5.55,-2.25) 37(5.55,-1.75) 38(5.55,-1.25) 39(5.55,-0.75) 40(5.55,-0.25) 41(5.55,0.25) 42(5.55,0.75) 43(5.55,1.25) 44(5.55,1.75) 45(5.55,2.25) 46(5.55,2.75) 47(5.55,3.25) 48(5.55,3.75)
  oval 0.3x1.8 smd: 17(-3.75,-5.55) 18(-3.25,-5.55) 19(-2.75,-5.55) 20(-2.25,-5.55) 21(-1.75,-5.55) 22(-1.25,-5.55) 23(-0.75,-5.55) 24(-0.25,-5.55) 25(0.25,-5.55) 26(0.75,-5.55) 27(1.25,-5.55) 28(1.75,-5.55) 29(2.25,-5.55) 30(2.75,-5.55) 31(3.25,-5.55) 32(3.75,-5.55) 49(3.75,5.55) 50(3.25,5.55) 51(2.75,5.55) 52(2.25,5.55) 53(1.75,5.55) 54(1.25,5.55) 55(0.75,5.55) 56(0.25,5.55) 57(-0.25,5.55) 58(-0.75,5.55) 59(-1.25,5.55) 60(-1.75,5.55) 61(-2.25,5.55) 62(-2.75,5.55) 63(-3.25,5.55) 64(-3.75,5.55)
  silkscreen extent -5.67,-4.25 4.25,4.57
LT3592 [mm]
  rect 2.1x2.8 smd: 0(2,-1)
  rect 0.9x0.3 smd: 1(0,0) 2(0,-0.5) 3(0,-1) 4(0,-1.5) 5(0,-2) 6(4,-2) 7(4,-1.5) 8(4,-1) 9(4,-0.5) 10(4,0)
MOLEX-47346-0001 [mil] "MOLEX-47346-0001"
  rect 67x18 smd: 1(111,52) 2(111,26) 3(111,0) 4(111,-25.59) 5(111,-51.18)
  rect 75x94 smd: 5(0,117) 5(0,-116.14)
  rect 75x47 smd: 5(0,33) 5(0,-32.97)
  rect 83x59 smd: 5(91,-98.43) 5(91,99)
MOS_DFN3x3 [mm]
  rect 0.4x0.3 smd: D(0,-2.9) D(0.65,-2.9) D(1.3,-2.9) D(1.95,-2.9)
  rect 2.45x1.98 smd: D(0.975,-1.76)
  rect 0.35x0.5 smd: G(0,0)
  rect 0.39x0.5 smd: S(0.65,0) S(1.3,0) S(1.95,0)
  body extent -0.53,-2.87 2.47,0.13, height 1
MOS_DFN5x6 [mm]
  rect 1.2x0.6 smd: D(-2.215,-1.905) D(-2.215,-0.605) D(-2.175,0.695) D(-2.175,1.995) G(3.175,1.995) S(3.175,-1.905) S(3.175,-0.605) S(3.175,0.695)
  rect 3.5x5 smd: D(-0.025,-0.005)
  silkscreen extent -3.02,-2.8 2.38,2.8
MPU6050-2 [mm]
  rect 0.8x0.3 smd: 1(-2,1.25) 2(-2,0.75) 3(-2,0.25) 4(-2,-0.25) 5(-2,-0.75) 6(-2,-1.25) 13(2,-1.25) 14(2,-0.75) 15(2,-0.25) 16(2,0.25) 17(2,0.75) 18(2,1.25)
  rect 0.3x0.8 smd: 7(-1.25,-2) 8(-0.75,-2) 9(-0.25,-2) 10(0.25,-2) 11(0.75,-2) 12(1.25,-2) 19(1.25,2) 20(0.75,2) 21(0.25,2) 22(-0.25,2) 23(-0.75,2) 24(-1.25,2)
  silkscreen extent -2.3,-2.3 2.3,2.3, body extent -1.75,-1.67 1.68,1.76, height 1
MS5611 [mm]
  rect 1.1x0.6 smd: 1(0,3.75) 2(0,2.5) 3(0,1.25) 4(0,0) 5(2.2,0) 6(2.2,1.25) 7(2.2,2.5) 8(2.2,3.75)
  body extent -0.51,-0.51 2.67,4.32, height 1
PiEyeLED [mm]
  rrect50% 1x1.5 hole 0.6: 1(0,0) 2(1.5,0) 3(3,0) 4(4.5,0)
  silkscreen extent -0.58,-3.4 5.65,3.4
PiFlashLight [mm]
  rect 2.1x3 smd: 0(-2,2.25) 0(3.5,2.25)
  rrect50% 1x1.5 smd: 1(0,-0.5) 2(1.5,-0.5)
PiMotor [mm]
  rrect50% 1.5x2 hole 0.75: 1(-2.5,0.5) 2(0,0.5) 3(2.5,0.5)
  silkscreen extent -4,-2.5 4,2.5
RFMODULE [mm]
  rect 2.5x0.8 smd: 0(32.6,-5) 0(32.6,0) 0(32.6,5) 1(1.27,5.715) 2(1.27,4.445) 3(1.27,3.175) 4(1.27,1.905) 5(1.27,0.635) 6(1.27,-0.635) 7(1.27,-1.905) 8(1.27,-3.175) 9(1.27,-4.445) 10(1.27,-5.715)
  silkscreen extent 0,-8 34,8
ServoConnector [mil]
  round 60 hole 30: 1(0,0) 2(100,0) 3(200,0)
SOD-123 [mm]
  rect 1x0.75 smd: 1(1.8,0) 3(-1.8,0)
  silkscreen extent -2.17,-0.8 1.35,1.02
sonar-10mm [mm]
  round 1.5 hole 0.8: 1(-2.45,0) 2(2.45,0)
  silkscreen extent -5,-5 5,5
sonar-16mm [mm]
  round 2 hole 1.2: 1(-5,0) 2(5,0)
  silkscreen extent -8.5,-8.5 8.5,8.5, body extent -7.94,-7.98 8,7.98, height 12
SOT23-5 [mil] "SOT23-5"
  rect 22x48 smd: 1(-37.4,-51.18) 2(0,-51.18) 3(38,-51.18) 4(38,52) 5(-37.4,52)
  silkscreen extent -56,-17 56,32
SOT23-8 [mil] "SOT23-8"
  rect 17x52 smd: 1(-38.39,-46.26) 2(-12.8,-46.26) 3(13,-46.26) 4(39,-46.26) 5(39,47) 6(13,47) 7(-12.8,47) 8(-38.39,47)
  silkscreen extent -59,-39 60,40
SOT23_L [mm] "SOT23, 3-Leads, Body 2.9x1.3mm, Pitch 0.95mm, Lead Span 2.3mm - Reverse Pinning, IPC High Density"
  rect 0.85x0.6 smd: 1(1.075,0) 2(-1.075,-0.95) 3(-1.075,0.95)
  silkscreen extent -0.3,-1.5 1.47,1.5, body extent -0.7,-1.5 0.7,1.5, height 1.1
SOT-23B_L [mm] "SOT23, 3-Leads, Body 2.9x1.3mm, Pitch 0.95mm, Lead Span 2.4mm, IPC High Density"
  rect 0.85x0.6 smd: 1(-1.075,0.95) 2(-1.075,-0.95) 3(1.075,0)
  silkscreen extent -1.2,-1.5 0.7,1.93, body extent -0.7,-1.5 0.7,1.5, height 1.14
SW1 [mm]
  rect 2.2x1.4 smd: 1(0,0) 2(5,-3.3) 3(5,0) 4(0,-3.3)
  silkscreen extent 1.6,-4.06 3.47,1.02
"TestPad - 1mm" [mm]
  round 1 smd: 1(0,0)
TF [mm]
  rect 0.55x1.6 smd: 1(10,10.1) 2(8.9,10.1) 3(7.8,10.1) 4(6.7,10.1) 5(5.6,10.1) 6(4.5,10.1) 7(3.4,10.1) 8(2.3,10.1) 9(1.2,10.1)
  rect 1.2x2.2 smd: SHELL(0,0) SHELL(15.5,0)
  rect 1.2x1.4 smd: SHELL(0,9.6)
  rect 1.6x1.4 smd: SHELL(14.6,9.6)
  silkscreen extent 0.41,-4.42 14.9,9.4
TSSOP14_44MM_065P [mm]
  oval 1.5x0.45 smd: 1(-2.95,1.95) 2(-2.95,1.3) 3(-2.95,0.65) 4(-2.95,0) 5(-2.95,-0.65) 6(-2.95,-1.3) 7(-2.95,-1.95) 8(2.95,-1.95) 9(2.95,-1.3) 10(2.95,-0.65) 11(2.95,0) 12(2.95,0.65) 13(2.95,1.3) 14(2.95,1.95)
  silkscreen extent -3.58,-2.5 1.87,2.82
WFRSM125 [mm]
  rect 0.81x2.5 smd: 1(-3.75,0) 2(-2.5,0) 3(-1.25,0) 4(0,0) 5(1.25,0) 6(2.5,0)
  rect 2.1x3 smd: shell(-6.3,-2.9) shell(5.05,-2.9)
  body extent -6.79,-3.82 5.46,0.38, height 3.4

## Part data
0R/NC R39 R40 R41 R42 R60 R62 R64 RX-R1 RX-R3 RX-R4 RX-R5 RX-R6 RX-R7 RX-R8 RX-R9 RX-R10 RX-R11 RX-R15 RX-R18 RX-R20 RX-R22: library part RESISTOR0603B, "<b>Resistor</b> / Basic schematic elements and footprints for 0603, 1206, and PTH 1/10th watt (small) resistors."
C1 C19 C20 C21 C22 C23 C25 C33: "Capacitor"
C2 C3 C4 C5 C6 C7 C8 C9 C10 C11 C12 C13 C14 C15 C16 C17 C32 C34 C35 C36 C37: library part CAP0402-CAP, "<b>Capacitor</b> / Standard 0603 ceramic capacitor, and 0.1\" leaded capacitor."
C18 C26: library part C-USC0402, "<B>CAPACITOR</B>, American symbol"
C24 C27 C28 C29 C30 C31: library part Cap, "Capacitor"
C702 RX-C7 RX-C8: library part CAP0603, "<b>Capacitor</b> / Standard 0603 ceramic capacitor, and 0.1\" leaded capacitor."
C703 C704: library part CAP0402, "<b>Capacitor</b> / Standard 0603 ceramic capacitor, and 0.1\" leaded capacitor."
D1: "Default Diode"
D2 D5: library part "Diode 10TQ035", "Schottky Rectifier"
D3 D4 D6: library part "Diode 1N4148", "High Conductance Fast Diode"
L701 rx-L1: library part INDUCTOR0805, "<b>Inductors</b> / Basic Inductor/Choke - 0603 and 1210. Footprints are not proven and vary greatly between part numbers. / SRR1210: Bourns SRR1210 parts, e.g. SRR1210-100M"
MCU1: "STM32 ARM-based 32-bit MCU with 64 Kbytes Flash, 64-pin LQFP, Industrial Temperature"
OP1: library part OP-SOP14
R1 R2 R8 R45 R46 R47 R48 R49 R56 R57 R58 R59 R61 R63: library part Res*4, "Resistor"
R3 R6 R44 R50 R51 R52 R53 R54 R55 R65 R? R?: library part Res2, "Resistor"
R4 R5 R7 R20 R21 R22 R23 R24 R25 R26 R27 R28 R29 R30 R31 R32 R33 R34 R35 R36 R37 R38 R43 R701 R702 R703 R705 R706: library part RESISTOR0402-RES, "<b>Resistor</b> / Basic schematic elements and footprints for 0603, 1206, and PTH 1/10th watt (small) resistors."
R9: library part CSS2725FTL250
R10 R11 R12 R13 R16: library part RESISTOR0402-RES, "<b>Resistor</b> / Basic schematic elements and footprints for 0603, 1206, and PTH resistors."
R14 R15 R17 R18 R19: "Resistor"
RX2 TX2: library part sonar
RX-C1 RX-C2 RX-C3 RX-C4 RXC-2 RXC-3 RXC-4: library part CAP0603H, "<b>Capacitor</b> / Standard 0603 ceramic capacitor, and 0.1\" leaded capacitor."
RXC-1: library part Cap2, "Capacitor"
SW: "Switch"
U1: library part V_REG_LDOSMD
U2: library part V_REG_LDOSMD, "<b>Voltage Regulator LDO</b> / Standard 150mA LDO voltage regulator in SOT-23 layout. Micrel part MIC5205. BP (by-pass) pin is used to lower output noise with 470pF cap."
U3: library part TS5A3159
U8: "HMC5983 LPCC-16 MEGA"
U702: "LT3469 Piezo microactuator driver with boost regulator"
USB1: library part USB_Micro_TypeB, "Connector SMD USB Micro Type B middle mount"
Y1: "Crystal Oscillator"

## Free pads (board coordinates)
  round 3 hole 2.3: 0(43.753,-14.621)
  round 2.5 hole 2: 0(43.891,-32.918) 1(2.211,-32.919) 1(40.538,-76.835) 2(2.362,-14.63) 3(5.564,-76.836)
  round 1.5 hole 1.2: 3(8.764,-94.636) 3(43.155,-25.629)

## Via types
v1: diameter 0.508, hole 0.305, Top Layer to Bottom Layer, 289 vias
v2: diameter 0.508/0.508/0.508/0.508 (per signal layer), hole 0.305, Top Layer to Bottom Layer, 44 vias

## Nets (pads, with @x,y where several pads share a name; then routed paths per layer and width w, separated by ;. In a path a pad name is that pad's centre, name@x,y a point inside that pad or via, vN(x,y) a via of type N, cw(c..) or ccw(c..) an arc to the next point about the centre after c; other vN are vias at no path point)
3.3A: Baro1.1 C14.1 C15.1 C24.2 C30.2 C32.1 imu1.13 MCU1.13 R50.1 U2.5 U8.2 U8.13 | length 114.1
  Top Layer w0.254: v1(3.808,-69.492) C24.2@4.5,-69.492 ; C24.2@4.557,-69.549 U8.2@5.803,-69.549 7.451,-69.549 8.028,-68.972 U8.13@8.028,-68.324 ; C30.2@21.789,-26.89 imu1.13@21.789,-25.568 ; 21.831,-26.441 26.441,-26.441 v1(26.5,-26.5) ; MCU1.13@26.867,-66.396 26.867,-67.231 26.875,-67.238 26.875,-67.638 26.867,-67.645 26.867,-70.355 29.731,-73.218 U2.5@31.018,-73.218 34.343,-73.218 34.343,-73.078 v1(33.655,-72.39) ; v1(34.671,-60.706) 34.544,-60.833 34.544,-63.344 R50.1@34.515,-63.373 35.673,-63.373 36.495,-64.195 Baro1.1@36.495,-68.834
  vertical w0.254: v1(26.5,-26.5) 26.5,-29.88 27.083,-30.463 27.083,-34.3 26.97,-34.413 26.97,-34.987 26.289,-35.667 26.289,-49.53 26.017,-49.802 26.017,-51.798 26.797,-52.578 27.05,-52.578 27.14,-52.669 27.154,-52.669 27.154,-64.679 26.85,-64.983 26.85,-67.213 26.875,-67.238 26.875,-67.638 26.85,-67.662 26.85,-69.45 v1(26.8,-69.5) ; v1(33.655,-72.39) 33.655,-71.425 34.493,-70.587 34.493,-60.884 v1(34.671,-60.706)
  horizontal w0.254: v1(3.808,-69.492) 3.816,-69.5 v1(26.8,-69.5)
3.3D: 0R/NC.2 C4.2 C5.2 C6.2 C7.2 C8.2 C9.2 C12.1 C13.1 debug1.4 MCU1.1 MCU1.19 MCU1.32 MCU1.48 MCU1.64 R6.2 R?.1@34.985,-57.252 U1.5 | length 90.6
  Top Layer w0.254: v1(4.742,-57.658) debug1.4@6.329,-57.658 ; C9.2@18.775,-66.04 19.918,-67.183 C8.2@20.045,-67.183 ; U1.5@18.953,-73.205 U1.5@19.006,-73.152 ; v1(19.05,-55.88) 19.791,-55.139 19.791,-54.22 ; MCU1.64@19.067,-64.596 MCU1.1@20.867,-66.396 20.08,-67.183 C8.2@20.045,-67.183 ; C7.2@19.791,-53.467 19.791,-54.22 ; MCU1.48@20.867,-55.296 19.791,-54.22 ; v1(20.9,-56.9) MCU1.48@20.9,-55.329 ; R6.2@22.839,-68.072 22.839,-72.784 C12.1@22.471,-73.152 ; 0R/NC.2@25.1,-77.492 25.1,-75.781 C12.1@22.471,-73.152 ; C4.2@29.824,-54.61 29.824,-54.737 C6.2@31.094,-56.007 31.729,-56.642 v1(31.877,-56.642) ; MCU1.19@30.167,-63.596 v2(31.904,-63.596) ; MCU1.32@30.167,-57.096 C6.2@31.094,-56.169 ; U1.5@19.006,-73.152 C12.1@22.471,-73.152 ; U1.5@19.006,-73.152 20.045,-72.113 v1(20.045,-67.818) C8.2@20.045,-67.183
  vertical w0.254: v1(19.05,-55.88) 19.253,-56.083 19.253,-67.026 v1(20.045,-67.818) ; v1(31.877,-56.642) 31.775,-56.744 31.775,-63.467 v2(31.904,-63.596)
  horizontal w0.254: v1(4.742,-57.658) 12.083,-57.658 ; 12.158,-57.658 12.083,-57.658 ; v1(20.9,-56.9) 14.168,-56.9 14.086,-56.817 12.924,-56.817 12.083,-57.658
  Bottom Layer w0.254: v1(20.9,-56.9) 21.017,-56.9 21.5,-56.417 23.535,-56.417 24.4,-57.283 31.236,-57.283 v1(31.877,-56.642) 34.375,-56.642 R?.1@34.985,-57.252